# EAGLE board backend_BatProtection (EAGLE 6.3)
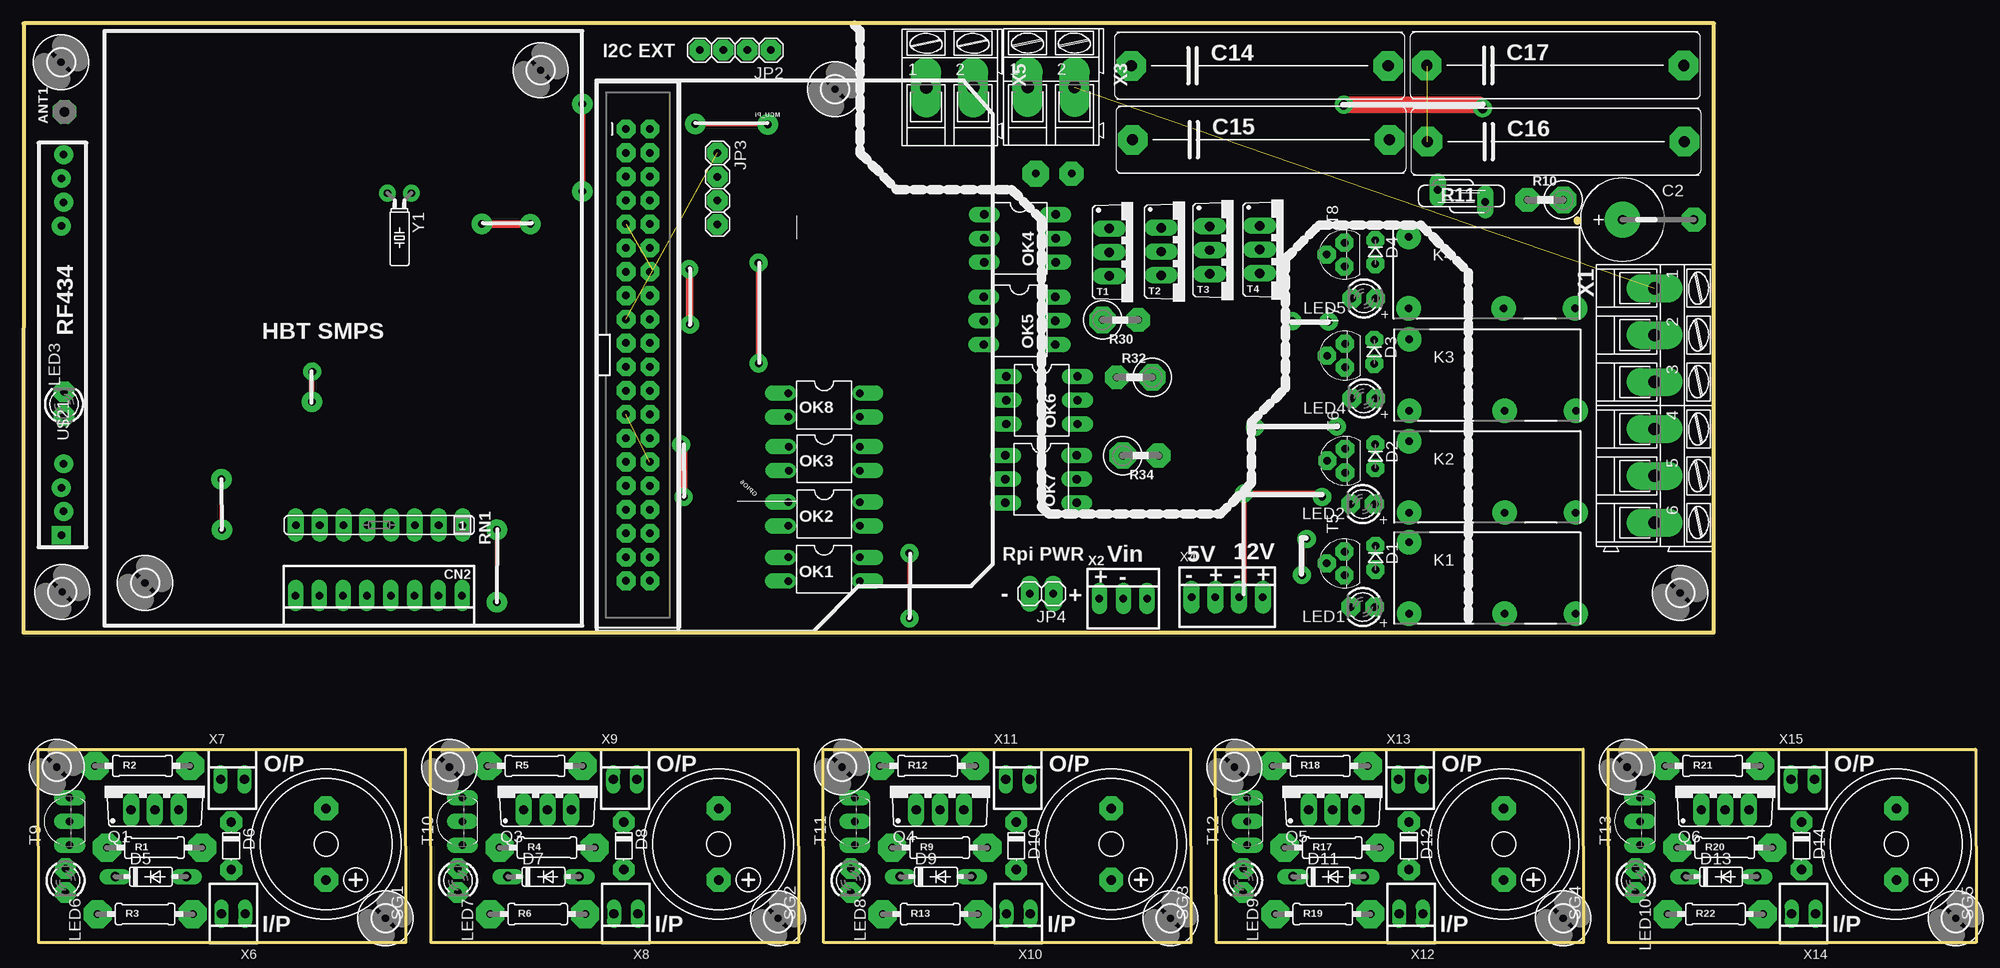
[diagram p0: board, top side]
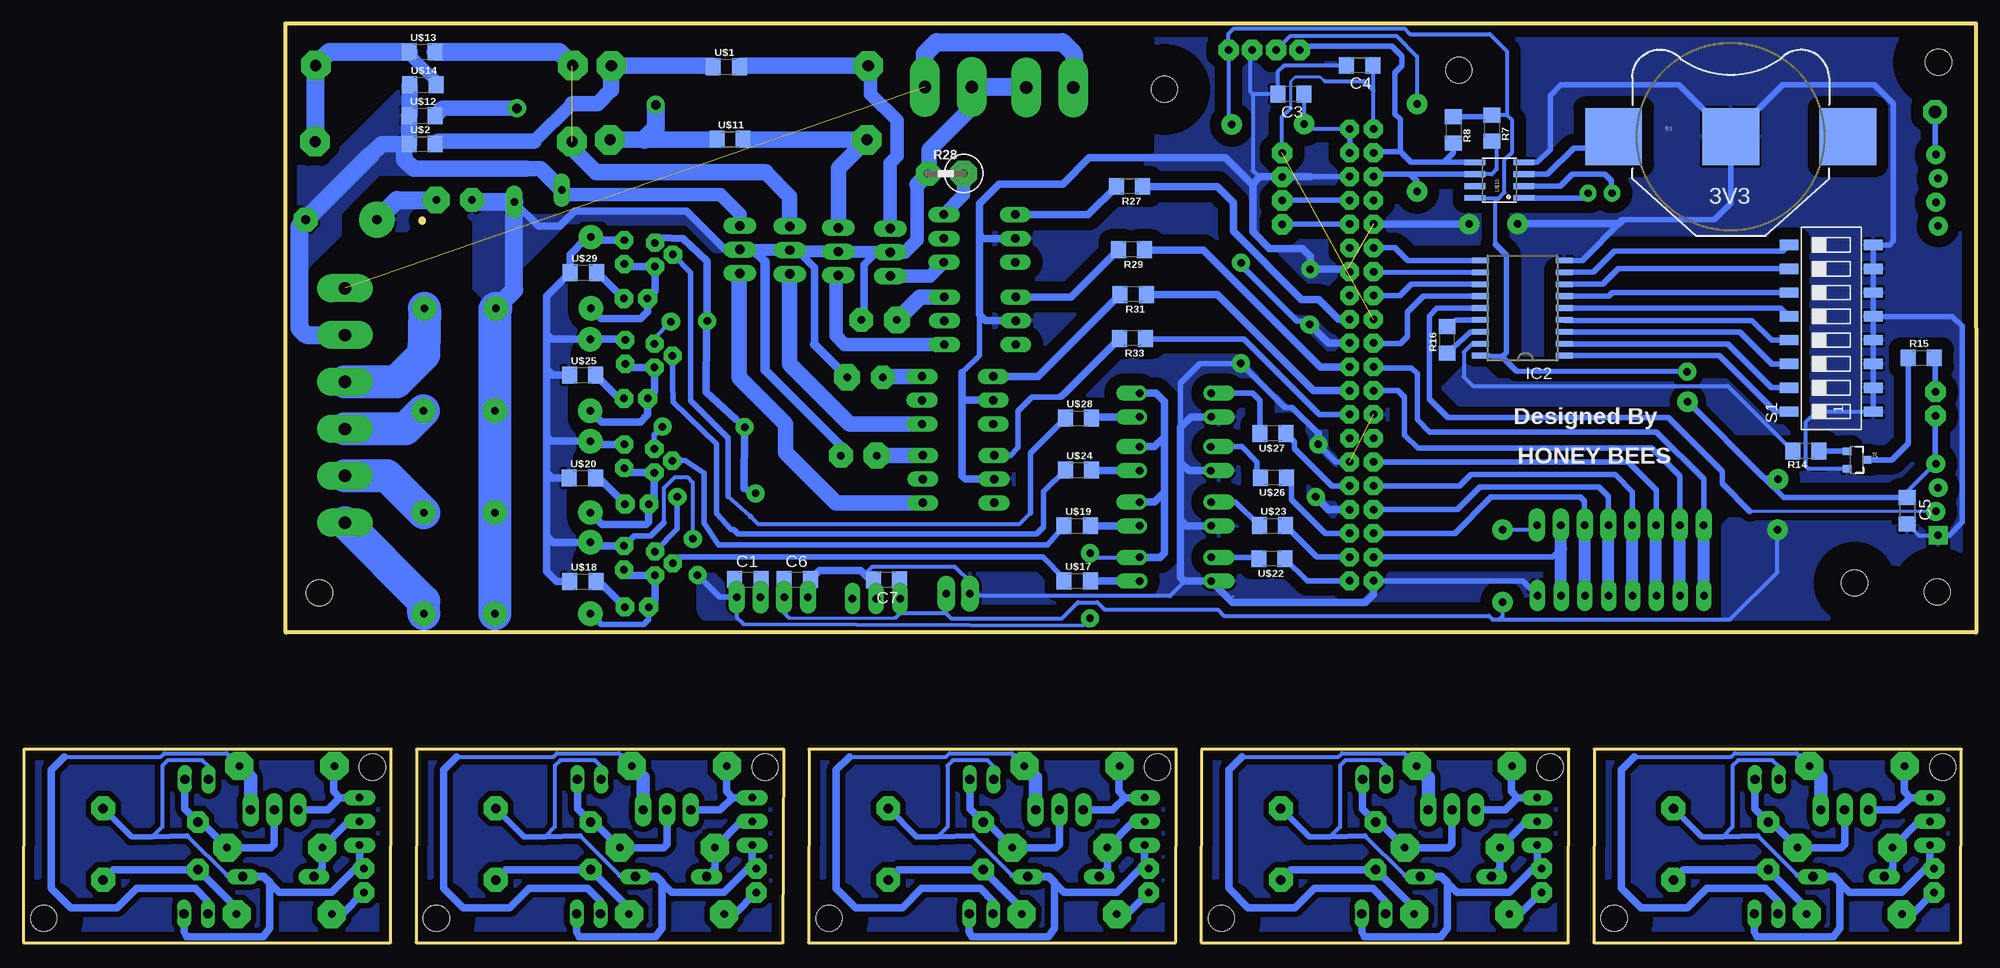
[diagram p1: board, bottom side, seen from below]

Size 208.47 x 98.16 mm. Coordinates in mm from the lower left corner, seen from the top.
Outline: 165.88,77.04 165.88,77.17
Outline: 1.56,20.65 40.77,20.65 40.83,0 1.61,0 1.56,20.64
Outline: 43.47,20.65 82.68,20.65 82.74,0 43.52,0 43.47,20.64
Outline: 85.38,20.65 124.59,20.65 124.65,0 85.43,0 85.38,20.64
Outline: 127.29,20.65 166.5,20.65 166.56,0 127.34,0 127.29,20.64
Outline: 169.2,20.65 208.41,20.65 208.47,0 169.25,0 169.2,20.64
Outline: 0,33.12 180.46,33.12 180.47,98.16 0.02,98.16 0,33.12
Copper layers (1*16): Top 0.035mm / dielectric 1.5mm / Bottom 0.035mm
Design rules "default": minimum track width 10mil, minimum drill 24mil, track to track 8mil, track to pad 8mil, pad to pad 8mil, via to via 8mil, smd to smd 8mil, copper to edge 40mil, drill to drill 8mil, minimum pad ring 10mil, minimum via ring 8mil, stop-mask expansion 4mil, vias tented up to drill 0mil, thermal gap 10mil

## Footprints (pad centres in the part's own frame; a part is rotated, then mirrored left to right if it is on the bottom)
PAD-01 = drill 1.321 pad 2.54 octagon: 1 0,0
BATTCON_20MM = smd 6.07 x 6.07: 1 -12.5,0; 2 0,0; 3 12.5,0
C1206 = smd 1.6 x 1.8: 1 -1.4,0; 2 1.4,0
E5R = drill 1 pad 3.81: + -2.54,0 | drill 1 pad 2.54 octagon: - 5.08,0
C27.5B9 = drill 1.194 pad 3.15 octagon: 1 -13.716,0; 2 13.716,0
22-23-2081 = drill 0.8 pad 1.676 long: 1 -8.89,0; 2 -6.35,0; 3 -3.81,0; 4 -1.27,0; 5 1.27,0; 6 3.81,0; 7 6.35,0; 8 8.89,0
D-2.5 = drill 0.8 pad 1.93 octagon: A 1.27,0; C -1.27,0
DO35-7 = drill 1 pad 1.676 long: A 3.81,0; C -3.81,0
D-5 = drill 1 pad 2.3 octagon: A 2.54,0; C -2.54,0
SOP18 = smd 0.6 x 1.8: 1 -5.08,-4.475; 2 -3.81,-4.475; 3 -2.54,-4.475; 4 -1.27,-4.475; 5 0,-4.475; 6 1.27,-4.475; 7 2.54,-4.475; 8 3.81,-4.475; 9 5.08,-4.475; 10 5.08,4.475; 11 3.81,4.5; 12 2.54,4.5; 13 1.27,4.5; 14 0,4.5; 15 -1.27,4.5; 16 -2.54,4.5; 17 -3.81,4.5; 18 -5.08,4.5
2X20-SHROUDED = drill 0.8 pad 2 octagon: 1 -1.27,24.13; 2 1.27,24.13; 3 -1.27,21.59; 4 1.27,21.59; 5 -1.27,19.05; 6 1.27,19.05; 7 -1.27,16.51; 8 1.27,16.51; 9 -1.27,13.97; 10 1.27,13.97; 11 -1.27,11.43; 12 1.27,11.43; 13 -1.27,8.89; 14 1.27,8.89; 15 -1.27,6.35; 16 1.27,6.35; 17 -1.27,3.81; 18 1.27,3.81; 19 -1.27,1.27; 20 1.27,1.27; 21 -1.27,-1.27; 22 1.27,-1.27; 23 -1.27,-3.81; 24 1.27,-3.81; 25 -1.27,-6.35; 26 1.27,-6.35; 27 -1.27,-8.89; 28 1.27,-8.89; 29 -1.27,-11.43; 30 1.27,-11.43; 31 -1.27,-13.97; 32 1.27,-13.97; 33 -1.27,-16.51; 34 1.27,-16.51; 35 -1.27,-19.05; 36 1.27,-19.05; 37 -1.27,-21.59; 38 1.27,-21.59; 39 -1.27,-24.13; 40 1.27,-24.13
1X04 = drill 0.8 pad 2.184 octagon: 1 -3.81,0; 2 -1.27,0; 3 1.27,0; 4 3.81,0
1X02 = drill 0.8 pad 1.93 long: 1 -1.27,0; 2 1.27,0
RE-SCHRACK = drill 0.8 pad 2.6: 11 8.89,-3.81; 14 1.27,-3.81; A1 -8.89,-3.81; A2 -8.89,3.81
LED3MM = drill 0.8 pad 2 octagon: A -1.27,0; K 1.27,0
LED3MM' = drill 0.8 pad 2.184 octagon: A -1.27,0; K 1.27,0
DIL04 = drill 0.8 pad 1.676 offset: 1 -1.27,-3.81; 2 1.27,-3.81; 3 1.27,3.81; 4 -1.27,3.81
DIL06 = drill 0.9 pad 1.676 long: 1 -2.54,-3.81; 2 0,-3.81; 3 2.54,-3.81; 4 2.54,3.81; 5 0,3.81; 6 -2.54,3.81
TO220BV = drill 1 pad 1.778 long: D 0,-2.54; G -2.54,-2.54; S 2.54,-2.54
SOT23-3 = smd 0.8 x 0.9: 1 -0.95,-1; 2 0.95,-1; 3 0,1.1
0207/10 = drill 0.8 pad 3 octagon: 1 -5.08,0; 2 5.08,0
1206 = smd 1.6 x 1.8: 1 -1.4,0; 2 1.4,0
0411V = drill 0.8 pad 2.8 octagon: 1 -2.54,0 | drill 0.8 pad 2.54 octagon: 2 1.27,0
S07K11 = drill 0.8 pad 1.778 long: 1 -0.635,-2.54; 2 0.635,2.54
SIL8 = drill 0.813 pad 1.778 long: 1 -8.89,0; 2 -6.35,0; 3 -3.81,0; 4 -1.27,0; 5 1.27,0; 6 3.81,0; 7 6.35,0; 8 8.89,0
SMS-008 = smd 1.092 x 2.007: 1 -8.89,-4.496; 2 -6.35,-4.496; 3 -3.81,-4.496; 4 -1.27,-4.496; 5 1.27,-4.496; 6 3.81,-4.496; 7 6.35,-4.496; 8 8.89,-4.496; 9 8.89,4.496; 10 6.35,4.496; 11 3.81,4.496; 12 1.27,4.496; 13 -1.27,4.496; 14 -3.81,4.496; 15 -6.35,4.496; 16 -8.89,4.496
F/HMB = drill 1.016 pad 2.54 octagon: + 3.81,0; - -3.81,0
TO220BV' = drill 1 pad 1.75 long: G 2.54,-2.54; T1 -2.54,-2.54; T2 0,-2.54
TO92 = drill 0.8 pad 1.93 octagon: 1 1.27,0; 2 0,1.905; 3 -1.27,0
TO92-EBC = drill 0.8 pad 1.676 long: B 0,-1.27; C 2.54,-1.27; E -2.54,-1.27
2,8 = hole 2.8: 0,0
SO08 = smd 0.61 x 2.21: 1 -1.905,-2.616; 2 -0.635,-2.616; 3 0.635,-2.616; 4 1.905,-2.616; 5 1.905,2.616; 6 0.635,2.616; 7 -0.635,2.616; 8 -1.905,2.616
RF-LINK_RX = drill 0.8 pad 2: +5V@1 7.62,-0.127; +5V@2 33.02,0.127; ANT 40.64,-0.127; DATA@1 2.54,-0.127; DATA@2 5.08,0.127; GND@2 35.56,-0.127; GND@3 38.1,0.127 | drill 0.8 pad 2 square: GND@1 0,0.127
AK300/6 = drill 1.321 pad 3 long: 1 -12.522,0; 2 -7.518,0; 3 -2.515,0; 4 2.515,0; 5 7.518,0; 6 12.522,0
22-23-2031 = drill 0.8 pad 1.676 long: 1 -2.54,0; 2 0,0; 3 2.54,0
AK300/2 = drill 1.321 pad 3.2 long: 1 -2.515,0; 2 2.489,0
22-23-2041 = drill 0.8 pad 1.778 long: 1 -3.81,0; 2 -1.27,0; 3 1.27,0; 4 3.81,0
22-23-2021 = drill 1 long: 1 -1.27,0; 2 1.27,0
TC26H = drill 0.8 pad 1.778: 1 -1.27,0; 2 1.27,0

## Placement (x,y rotation side)
ANT1  [PAD-01]  4.38,88.71 0 top
B1  [BATTCON_20MM]  26.2,86.06 0 bottom
C1  [C1206]  131.14,38.79 0 bottom
C2  [E5R]  173.25,77.19 0 top
C3  [C1206]  73.14,90.59 180 bottom
C4  [C1206]  65.8,93.66 180 bottom
C5  [C1206]  7.35,46.12 270 bottom
C6  [C1206]  125.85,38.79 0 bottom
C7  [C1206]  116.33,38.72 180 bottom
C14  2.2uF/250VAC  [C27.5B9]  131.99,93.63 0 top
C15  3.3uF/250VAC  [C27.5B9]  132.12,85.73 0 top
C16  2.2uF/250VAC  [C27.5B9]  163.61,85.54 0 top
C17  3.3uF/250VAC  [C27.5B9]  163.54,93.67 0 top
CN2  Capsense I/P  [22-23-2081]  37.94,37.06 180 top
D1  [D-2.5]  144.35,41.09 270 top
D2  [D-2.5]  144.33,51.93 270 top
D3  [D-2.5]  144.22,63.08 270 top
D4  [D-2.5]  144.33,73.74 270 top
D5  1N4148DO35-7  [DO35-7]  13.61,7.04 0 top
D6  [D-5]  22.18,10.32 270 top
D7  1N4148DO35-7  [DO35-7]  55.52,7.04 0 top
D8  [D-5]  64.09,10.32 270 top
D9  1N4148DO35-7  [DO35-7]  97.43,7.04 0 top
D10  [D-5]  106,10.32 270 top
D11  1N4148DO35-7  [DO35-7]  139.34,7.04 0 top
D12  [D-5]  147.91,10.32 270 top
D13  1N4148DO35-7  [DO35-7]  181.25,7.04 0 top
D14  [D-5]  189.82,10.32 270 top
IC2  HT680D  [SOP18]  48.44,67.76 90 bottom
JP1  RASPBERRYPI-B+-GPIO  [2X20-SHROUDED]  65.6,62.75 0 top
JP2  [1X04]  76,95.3 180 top
JP3  [1X04]  74.1,80.52 270 top
JP4  [1X02]  108.7,37.25 180 top
K1  RE030012  [RE-SCHRACK]  156.85,38.94 0 top
K2  RE030012  [RE-SCHRACK]  156.85,49.74 0 top
K3  RE030012  [RE-SCHRACK]  156.85,60.61 0 top
K4  RE030012  [RE-SCHRACK]  156.77,71.52 0 top
LED1  [LED3MM]  142.99,35.84 180 top
LED2  [LED3MM]  142.97,46.83 180 top
LED3  [LED3MM']  4.34,57.52 90 top
LED4  [LED3MM]  143.09,58.1 180 top
LED5  [LED3MM]  143.11,68.78 180 top
LED6  [LED3MM']  4.5,6.63 270 top
LED7  [LED3MM']  46.41,6.63 270 top
LED8  [LED3MM']  88.32,6.63 270 top
LED9  [LED3MM']  130.23,6.63 270 top
LED10  [LED3MM']  172.14,6.63 270 top
OK1  PC817  [DIL04]  85.47,39.86 270 top
OK2  PC817  [DIL04]  85.49,45.77 270 top
OK3  PC817  [DIL04]  85.5,51.68 270 top
OK4  MOC3041M  [DIL06]  106.38,75.2 270 top
OK5  MOC3041M  [DIL06]  106.33,66.4 270 top
OK6  MOC3041M  [DIL06]  108.72,57.91 270 top
OK7  MOC3041M  [DIL06]  108.65,49.49 270 top
OK8  PC817  [DIL04]  85.49,57.41 270 top
Q1  IRF540  [TO220BV]  14.04,16.71 0 top
Q2  MMBT2222A  [SOT23-3]  12.76,51.54 270 bottom
Q3  IRF540  [TO220BV]  55.95,16.71 0 top
Q4  IRF540  [TO220BV]  97.86,16.71 0 top
Q5  IRF540  [TO220BV]  139.77,16.71 0 top
Q6  IRF540  [TO220BV]  181.68,16.71 0 top
R1  [0207/10]  14,10.14 0 top
R2  [0207/10]  12.71,18.87 0 top
R3  [0207/10]  13,3.04 0 top
R4  [0207/10]  55.91,10.14 0 top
R5  [0207/10]  54.62,18.87 0 top
R6  [0207/10]  54.91,3.04 0 top
R7  4k7  [1206]  51.69,86.96 270 bottom
R8  4k7  [1206]  55.8,86.78 270 bottom
R9  [0207/10]  97.82,10.14 0 top
R10  [0411V]  161.85,79.3 180 top
R11  S07K11  [S07K11]  153.52,79.72 270 top
R12  [0207/10]  96.53,18.87 0 top
R13  [0207/10]  96.82,3.04 0 top
R14  10K  [1206]  18.17,52.49 180 bottom
R15  560R  [1206]  5.85,62.45 0 bottom
R16  33k  [1206]  56.47,64.38 90 bottom
R17  [0207/10]  139.73,10.14 0 top
R18  [0207/10]  138.44,18.87 0 top
R19  [0207/10]  138.73,3.04 0 top
R20  [0207/10]  181.64,10.14 0 top
R21  [0207/10]  180.35,18.87 0 top
R22  [0207/10]  180.64,3.04 0 top
R27  560R  [1206]  90.39,80.74 180 bottom
R28  470R/0.5W  [0411V]  110.62,82.11 180 bottom
R29  560R  [1206]  90.18,73.99 180 bottom
R30  470R/0.5W  [0411V]  117.74,66.49 0 top
R31  560R  [1206]  89.98,69.21 180 bottom
R32  470R/0.5W  [0411V]  117.99,60.37 180 top
R33  560R  [1206]  90.06,64.52 180 bottom
R34  470R/0.5W  [0411V]  119.91,52.01 0 top
RN1  [SIL8]  37.98,44.59 180 top
S1  SWS008  [SMS-008]  15.48,65.6 90 bottom
SG1  F/HMB  [F/HMB]  32.31,10.51 270 top
SG2  F/HMB  [F/HMB]  74.22,10.51 270 top
SG3  F/HMB  [F/HMB]  116.13,10.51 270 top
SG4  F/HMB  [F/HMB]  158.04,10.51 270 top
SG5  F/HMB  [F/HMB]  199.95,10.51 270 top
T1  BTB16-V  [TO220BV']  118.48,73.72 270 top
T2  BTB16-V  [TO220BV']  124,73.79 270 top
T3  BTB16-V  [TO220BV']  129.2,73.95 270 top
T4  BTB16-V  [TO220BV']  134.52,74.01 270 top
T5  BC547  [TO92]  141.05,40.49 90 top
T6  BC547  [TO92]  141.11,51.45 90 top
T7  BC547  [TO92]  141.08,62.68 90 top
T8  BC547  [TO92]  141.04,73.47 90 top
T9  [TO92-EBC]  3.67,12.94 90 top
T10  [TO92-EBC]  45.58,12.94 90 top
T11  [TO92-EBC]  87.49,12.94 90 top
T12  [TO92-EBC]  129.4,12.94 90 top
T13  [TO92-EBC]  171.31,12.94 90 top
U$1  220K  [1206]  133.42,93.53 0 bottom
U$2  2E2  [1206]  165.89,85.28 0 bottom
U$3  [2,8]  55.22,93.15 0 top
U$4  [2,8]  12.98,38.4 0 top
U$5  [2,8]  4.01,94.01 0 top
U$6  [2,8]  4.16,37.44 0 top
U$7  [2,8]  176.87,37.33 0 top
U$8  [2,8]  86.64,91.12 0 top
U$9  [2,8]  3.57,18.74 0 top
U$10  [2,8]  38.65,2.58 0 top
U$11  220K  [1206]  133.02,85.79 0 bottom
U$12  2E2  [1206]  165.91,88.3 0 bottom
U$13  220K  [1206]  165.89,95.12 0 bottom
U$14  2E2  [1206]  165.82,91.6 0 bottom
U$15  DS1307SO8  [SO08]  50.9,81.42 90 bottom
U$16  [2,8]  45.48,18.74 0 top
U$17  1k  [1206]  95.97,38.63 0 bottom
U$18  1k  [1206]  148.74,38.56 0 bottom
U$19  1k  [1206]  95.96,44.51 0 bottom
U$20  1k  [1206]  148.8,49.6 0 bottom
U$21  RF-LINK_RX  [RF-LINK_RX]  4.17,43.5 90 top
U$22  1k  [1206]  75.17,40.99 180 bottom
U$23  1k  [1206]  75.13,44.52 0 bottom
U$24  1k  [1206]  95.84,50.47 0 bottom
U$25  1k  [1206]  148.76,60.6 0 bottom
U$26  1k  [1206]  75.03,49.64 180 bottom
U$27  1k  [1206]  75.06,54.37 180 bottom
U$28  1k  [1206]  95.81,56 0 bottom
U$29  1k  [1206]  148.69,71.54 0 bottom
U$30  [2,8]  80.56,2.58 0 top
U$31  [2,8]  87.39,18.74 0 top
U$32  [2,8]  122.47,2.58 0 top
U$33  [2,8]  129.3,18.74 0 top
U$34  [2,8]  164.38,2.58 0 top
U$35  [2,8]  171.21,18.74 0 top
U$36  [2,8]  206.29,2.58 0 top
X1  [AK300/6]  174.14,57.36 270 top
X2  22-23-2031  [22-23-2031]  117.42,36.75 0 top
X3  [AK300/2]  109.72,91.36 0 top
X4  22-23-2041  [22-23-2041]  128.52,36.9 0 top
X5  [AK300/2]  98.9,91.33 0 top
X6  22-23-2021  [22-23-2021]  22.4,3.08 180 top
X7  22-23-2021  [22-23-2021]  22.33,17.43 0 top
X8  22-23-2021  [22-23-2021]  64.31,3.08 180 top
X9  22-23-2021  [22-23-2021]  64.24,17.43 0 top
X10  22-23-2021  [22-23-2021]  106.22,3.08 180 top
X11  22-23-2021  [22-23-2021]  106.15,17.43 0 top
X12  22-23-2021  [22-23-2021]  148.13,3.08 180 top
X13  22-23-2021  [22-23-2021]  148.06,17.43 0 top
X14  22-23-2021  [22-23-2021]  190.04,3.08 180 top
X15  22-23-2021  [22-23-2021]  189.97,17.43 0 top
Y1  32.768KHz  [TC26H]  40.15,80.03 180 top

## Library data of the parts
ANT1 = discrete
B1 = SparkFun-Electromechanical
C1-C7 R1-R6 R9 R10 R12 R13 R17-R22 R28 R30 R32 R34 = rcl
C14-C17 = capacitor-wima
CN2 = con-molex; MF: MOLEX; MPN: 22-23-2081; OC_FARNELL: 1756826; OC_NEWARK: 01C7592
D1-D14 = diode
IC2 = holtek; OC_FARNELL: unknown; OC_NEWARK: unknown
JP1 = SparkFun-Boards
JP2-JP4 = pinhead
K1-K4 = relay; MF: TYCO ELECTRONICS; MPN: RE030012; OC_FARNELL: 515840; OC_NEWARK: 17M1743
LED1 LED2 LED4 LED5 = adafruit
LED3 LED6-LED10 = led
OK1-OK3 OK8 = optocoupler; MPN: PC817X4J000F; OC_FARNELL: 9707727; OC_NEWARK: 97K7059
OK4 = optocoupler; MF: FAIRCHILD SEMICONDUCTOR; MPN: MOC3041M; OC_FARNELL: 1086677; OC_NEWARK: 78K6090
OK5-OK7 = optocoupler; MF: FAIRCHILD SEMICONDUCTOR; MPN: MOC3031SM; OC_FARNELL: unknown; OC_NEWARK: 34C1335
Q1 Q3-Q6 = transistor-power
Q2 = SparkFun-DiscreteSemi; PROD_ID: TRANS-08049
R7 R8 R14 = SparkFun-Passives
R11 = varistor
R15 R16 R27 R29 R31 R33 U$1 U$2 U$11-U$14 U$17-U$20 U$22-U$29 = SparkFun-Resistors
RN1 = resistor-sil; OC_FARNELL: unknown; OC_NEWARK: unknown
S1 = smd-special
SG1-SG5 = buzzer; OC_FARNELL: unknown; OC_NEWARK: unknown
T1-T4 = triac
T5-T8 = transistor
T9-T13 = transistor-neu-to92
U$3-U$10 U$16 U$30-U$36 = holes
U$15 = SparkFun-FreqCtrl
U$21 = SparkFun-RF
X1 X3 X5 = con-ptr500; OC_FARNELL: unknown; OC_NEWARK: unknown
X2 = con-molex; MF: MOLEX; MPN: 22-23-2031; OC_FARNELL: 1462950; OC_NEWARK: 30C0862
X4 = con-molex; MF: MOLEX; MPN: 22-23-2041; OC_FARNELL: 1462920; OC_NEWARK: 38C0355
X6-X15 = con-molex; MF: MOLEX; MPN: 22-23-2021; OC_FARNELL: 1462926; OC_NEWARK: 25C3832
Y1 = crystal; OC_FARNELL: unknown; OC_NEWARK: unknown

## Nets
(DIN)TE: IC2.14 U$21.DATA@1
(VT)ADOUT: IC2.17 R14.2
+: Q1.S R2.2 X6.2
+1: Q3.S R5.2 X8.2
+2: Q4.S R12.2 X10.2
+3: Q5.S R18.2 X12.2
+3V3: C4.1 JP1.1 JP1.17 JP3.1
+4: Q6.S R21.2 X14.2
+5V: C3.1 C5.1 C6.1 C7.1 IC2.18 JP1.2 JP1.4 JP2.1 JP4.1 LED3.A R7.1 R8.1 RN1.1 U$15.8 U$21.+5V@1 X2.1 X4.2
+12V: C1.1 D1.C D2.C D3.C D4.C K1.A2 K2.A2 K3.A2 K4.A2 OK1.4 OK2.4 OK3.4 OK8.4 U$18.1 U$20.1 U$25.1 U$29.1 X4.4
-12V: C1.2 T5.1 T6.1 T7.1 T8.1 X4.3
A0: IC2.1 S1.16
A1: IC2.2 S1.15
A2: IC2.3 S1.14
A3: IC2.4 S1.13
A4: IC2.5 S1.12
A5: IC2.6 S1.11
A6: IC2.7 S1.10
A7: IC2.8 S1.9
DOWN: CN2.7 JP1.23 RN1.7
FAN_ON/OFF: CN2.8 JP1.21 RN1.8
FAN_REG: C2.- R11.1 T4.T1 U$2.1 U$12.1 U$14.1 X1.2
G: D5.A LED6.A SG1.- T9.E X6.1 X7.1
G1: D7.A LED7.A SG2.- T10.E X8.1 X9.1
G2: D9.A LED8.A SG3.- T11.E X10.1 X11.1
G3: D11.A LED9.A SG4.- T12.E X12.1 X13.1
G4: D13.A LED10.A SG5.- T13.E X14.1 X15.1
GND: B1.2 C3.2 C4.2 C5.2 C6.2 C7.2 CN2.1 IC2.9 JP1.6 JP1.9 JP1.14 JP1.20 JP1.25 JP1.30 JP1.34 JP1.39 JP2.2 JP3.2 JP4.2 OK1.2 OK2.2 OK3.2 OK4.2 OK5.2 OK6.2 OK7.2 OK8.2 Q2.2 S1.1 S1.2 S1.3 S1.4 S1.5 S1.6 S1.7 S1.8 U$15.4 U$21.GND@1 X2.2 X4.1
L1: JP1.40 U$22.1
L2: JP1.38 U$23.2
L3: JP1.36 U$26.1
L4: JP1.32 U$27.1
LEVEL1: JP1.18 R27.1
LEVEL2: JP1.22 R29.1
LEVEL3: JP1.24 R31.1
LEVEL4: JP1.26 R33.1
LINE: K1.14 K2.14 K3.14 K4.14 R10.2 R11.2 R28.2 R30.2 R32.1 R34.2 T1.T2 T2.T2 T3.T2 T4.T2 X3.1 X5.2
N$1: OK6.1 R31.2
N$2: OK4.1 R27.2
N$3: OK5.1 R29.2
N$4: OK4.6 R28.1
N$5: OK7.1 R33.2
N$6: JP1.16
N$7: OK1.3 U$17.2
N$8: JP1.12
N$9: T5.2 U$17.1
N$10: D1.A K1.A1 LED1.K T5.3
N$11: LED1.A U$18.2
N$12: OK1.1 U$22.2
N$13: U$15.2 Y1.2
N$14: OK2.1 U$23.1
N$15: OK2.3 U$19.2
N$16: T6.2 U$19.1
N$17: C2.+ R10.1
N$18: D2.A K2.A1 LED2.K T6.3
N$19: Q2.1 R14.1
N$20: U$15.7
N$21: U$15.1 Y1.1
N$22: K3.11 X1.4
N$23: B1.1 U$15.3
N$24: Q2.3 R15.1
N$25: LED2.A U$20.2
N$26: K1.11 X1.6
N$27: LED3.K R15.2
N$28: K2.11 X1.5
N$29: OK5.6 R30.1
N$30: OK6.6 R32.2
N$31: ANT1.1 U$21.ANT
N$32: OK3.1 U$26.2
N$33: OK8.3 U$28.2
N$34: OK7.6 R34.1
N$35: OK3.3 U$24.2
N$36: T7.2 U$24.1
N$37: T8.2 U$28.1
N$38: D3.A K3.A1 LED4.K T7.3
N$39: K4.11 X1.3
N$40: LED4.A U$25.2
N$41: D4.A K4.A1 LED5.K T8.3
N$43: LED5.A U$29.2
N$44: OK8.1 U$27.2
N$45: Q1.G R2.1 T9.C
N$46: D6.C Q1.D R1.2 X7.2
N$47: D5.C R1.1 T9.B
N$48: Q3.G R5.1 T10.C
N$49: D6.A R3.2 SG1.+
N$50: LED6.K R3.1
N$51: D8.C Q3.D R4.2 X9.2
N$52: D7.C R4.1 T10.B
N$53: D8.A R6.2 SG2.+
N$54: OK4.4 T1.G
N$55: C14.1 T1.T1 U$1.2
N$56: C14.2 U$1.1 U$2.2
N$57: LED7.K R6.1
N$59: Q4.G R12.1 T11.C
N$60: D10.C Q4.D R9.2 X11.2
N$61: D9.C R9.1 T11.B
N$62: OK5.4 T2.G
N$63: C15.1 T2.T1 U$11.2
N$64: C15.2 U$11.1 U$12.2
N$65: D10.A R13.2 SG3.+
N$66: LED8.K R13.1
N$68: Q5.G R18.1 T12.C
N$69: D12.C Q5.D R17.2 X13.2
N$70: OK6.4 T3.G
N$71: C16.1 C17.1 T3.T1 U$13.2
N$72: C16.2 C17.2 U$13.1 U$14.2
N$73: D11.C R17.1 T12.B
N$74: D12.A R19.2 SG4.+
N$75: LED9.K R19.1
N$77: Q6.G R21.1 T13.C
N$78: OK7.4 T4.G
N$79: D14.C Q6.D R20.2 X15.2
N$80: D13.C R20.1 T13.B
N$81: D14.A R22.2 SG5.+
N$82: LED10.K R22.1
NEUTRAL: X1.1 X3.2 X5.1
OSC1: IC2.16 R16.1
OSC2: IC2.15 R16.2
RFD0: IC2.10 JP1.11
RFD1: IC2.11 JP1.13
RFD2: IC2.12 JP1.15
RFD3: IC2.13 JP1.19
RX: JP1.10 JP3.4
SCL: JP1.5 JP2.3 R7.2 U$15.6
SDA: JP1.3 JP2.4 R8.2 U$15.5
SW-1: CN2.2 JP1.37 RN1.2
SW-2: CN2.3 JP1.35 RN1.3
SW-3: CN2.4 JP1.33 RN1.4
SW-4: CN2.5 JP1.31 RN1.5
TX: JP1.8 JP3.3
UP: CN2.6 JP1.29 RN1.6

## Tracks (layer width: path | path; a pad name or v marks a point on that pad's centre or on a via)
(DIN)TE
  Bottom 0.305: U$21.DATA@1 24.13,46.04
  Bottom 0.61: 24.13,46.04 27.09,49 27.09,50.3 32.83,56.05 56.37,56.05 58.39,58.07 58.39,66.91 57.56,67.74 52.95,67.74 IC2.14
(VT)ADOUT
  Bottom 0.406: IC2.17 52.73,63.95 52.63,63.85 53.89,63.85 54.69,63.04 54.69,60.41 53.71,59.43 26.51,59.43 R14.2
  pour Bottom (isolate 0.813): 19.94,54.39 25.59,60.04 51.12,60.04 52.58,61.49 54.67,61.49 56.94,59.22 56.94,59.16 54.85,57.07 32.22,57.07 29.55,54.4 19.95,54.4
+
  Bottom 0.406: 36.46,19.84 26.14,19.84 25.76,20.22 19.15,20.22 18.77,19.84
  Bottom 0.813: X6.2 21.13,4.42 22.49,5.78 28.75,5.78 30.81,3.72 35.8,3.72 37.86,5.78 37.86,18.44 36.46,19.84 | 18.77,19.84 R2.2
  Bottom 1.422: Q1.S 16.58,17.65 R2.2
+1
  Bottom 0.406: 78.37,19.84 68.05,19.84 67.67,20.22 61.06,20.22 60.68,19.84
  Bottom 0.813: X8.2 63.04,4.42 64.4,5.78 70.66,5.78 72.72,3.72 77.71,3.72 79.77,5.78 79.77,18.44 78.37,19.84 | 60.68,19.84 R5.2
  Bottom 1.422: Q3.S 58.49,17.65 R5.2
+2
  Bottom 0.406: 120.28,19.84 109.96,19.84 109.58,20.22 102.97,20.22 102.59,19.84
  Bottom 0.813: X10.2 104.95,4.42 106.31,5.78 112.57,5.78 114.63,3.72 119.62,3.72 121.68,5.78 121.68,18.44 120.28,19.84 | 102.59,19.84 R12.2
  Bottom 1.422: Q4.S 100.4,17.65 R12.2
+3
  Bottom 0.406: 162.19,19.84 151.87,19.84 151.49,20.22 144.88,20.22 144.5,19.84
  Bottom 0.813: X12.2 146.86,4.42 148.22,5.78 154.48,5.78 156.54,3.72 161.53,3.72 163.59,5.78 163.59,18.44 162.19,19.84 | 144.5,19.84 R18.2
  Bottom 1.422: Q5.S 142.31,17.65 R18.2
+3V3  (1 unrouted)
  Bottom 0.305: 73.17,89.09 73.17,91.96 72.68,92.46 70.04,92.46 69.56,91.98
  Bottom 0.406: JP1.1 64.33,90.95 | 64.33,90.95 64.33,93.39 C4.1 | JP3.1 74.1,88.17 73.17,89.09 | 69.56,91.98 65.36,91.98 64.33,90.95
+4
  Bottom 0.406: 204.1,19.84 193.78,19.84 193.4,20.22 186.79,20.22 186.41,19.84
  Bottom 0.813: X14.2 188.77,4.42 190.13,5.78 196.39,5.78 198.45,3.72 203.44,3.72 205.5,5.78 205.5,18.44 204.1,19.84 | 186.41,19.84 R21.2
  Bottom 1.422: Q6.S 184.22,17.65 R21.2
+5V  (via drill 0.8 pad 1.93, 0.8 pad 2.18)
  Top 0.406: v50.56,36.35 v50.56,44.11 | v21.2,44.07 21.16,44.12 v21.16,49.47 | v79.46,87.35 71.81,87.35 v71.74,87.43
  Top 0.61: v30.78,57.75 30.78,61.16 v30.84,60.96
  Bottom 0.305: 126.75,34.68 115.39,34.68
  Bottom 0.406: U$15.8 50.96,79.51 | 50.96,79.51 50.34,80.13 50.34,83.6 49.52,84.42 49.52,87.8 50.09,88.37 | 50.09,88.37 R7.1 | 4.34,51.16 7.35,48.15 C5.1 | C6.1 127.25,35.18 126.75,34.68 | 115.39,34.68 114.79,35.27 | 114.79,35.27 114.79,36.66 X2.1 | JP4.1 109.97,35.17 | 109.97,35.17 109.43,34.63 97.58,34.63 95.88,36.33 93.82,36.33 93.05,35.56 80.94,35.56 80.28,34.9 52.01,34.9 51.59,34.48 50.93,34.48 | v50.56,44.11 47.35,44.11 RN1.1 | 109.97,35.17 114.69,35.17 114.79,35.27 | 50.93,34.48 26.27,34.48 21.2,39.55 v21.2,44.07 | v21.16,49.47 21.36,49.67 22.7,49.67 | v50.56,36.35 50.56,34.85 50.93,34.48 | 50.09,88.37 50.12,88.39 50.12,95.2 51.93,97.01 60.44,97.01 61.05,97.62 79.22,97.62 79.81,97.03 JP2.1 79.81,87.71 v79.46,87.35 | C3.1 v71.74,87.43 71.25,86.94 66.92,86.94 JP1.2 | 51.31,74.6 51.31,79.17 50.96,79.51
  Bottom 0.61: LED3.A 4.34,51.16 U$21.+5V@1 | IC2.18 50.64,62.56 | 50.64,62.56 50.13,63.01 50.13,73.43 51.31,74.6 | JP1.2 JP1.4 | C5.1 20.55,47.52 22.7,49.67 v30.78,57.75 | v30.84,60.96 49.09,61.05 50.64,62.56 | R8.1 51.88,88.18 R7.1
  Bottom 0.813: C7.1 114.93,36.8 X2.1 114.88,36.81 | X4.2 C6.1
  pour Bottom (isolate 0.813): 9.4,45.15 26.29,45.15 26.94,44.49 26.94,33.77 8.83,33.77 8.83,45.17 9.32,45.17
+12V  (via drill 0.8 pad 1.93)
  Top 0.406: v94.6,34.62 94.59,35.93 v94.59,41.58
  Top 0.61: v137,43.1 136.5,42.61 v136.5,39.25
  Bottom 0.406: 140.08,44.85 140.08,48.54 138.91,49.71 137.56,49.71 137,49.15 v137,43.1 | X4.4 132.33,34.73 131.61,34.01 95.34,33.88 v94.6,34.62 | v94.59,41.58 94.14,41.13 OK1.4
  Bottom 0.61: D1.C 143.29,43.42 141.51,43.42 140.08,44.85 | v136.5,39.25 134.15,36.9 X4.4
  Bottom 0.813: OK8.4 87.56,58.68 86.65,57.77 86.65,54.01 | 86.65,54.01 86.65,48.11 | 86.65,48.11 86.65,41.58 87.12,41.11 89.27,41.11 OK1.4 | OK2.4 87.72,47.04 86.65,48.11 | OK3.4 87.71,52.95 86.65,54.01 | D4.C 147.55,75.01 K4.A2 148.01,75.2 148.37,75.2 150.09,73.49 U$29.1 152.6,69.03 152.6,64.97 | 152.6,64.97 152.6,61.24 | 152.6,61.24 152.6,54.03 | 152.6,54.03 152.6,50.19 | 152.6,50.19 152.6,43.43 | 152.6,43.43 152.6,39.62 151.55,38.56 U$18.1 | 152.6,43.43 151.93,42.75 K1.A2 147.56,42.36 D1.C | U$20.1 152.01,49.6 152.6,50.19 | 152.6,54.03 152.12,53.55 K2.A2 147.61,53.2 D2.C | U$25.1 151.97,60.6 152.6,61.24 | 152.6,64.97 152.05,64.42 K3.A2 144.29,64.42 D3.C | X4.4 132.54,37.1 C1.1
  pour Bottom: 150.58,70.92 150.58,67.5 arc-90 148.1,65.02 arc-90 150.3,62.81 150.3,60.76 arc90 150.58,60.48 152.48,60.48 arc90 152.63,60.64 152.63,69.03 152.48,69.03 150.58,70.92
  pour Bottom: 150.61,60.21 150.61,56.21 arc-90 147.96,53.56 arc-90 150.07,51.45 150.07,49.55 arc90 150.52,49.11 152.52,49.11 152.52,60.21 150.61,60.21
  pour Bottom: 150.7,49.48 150.7,45.56 arc-90 148.01,42.87 arc-90 150.09,40.8 150.09,38.2 arc90 152.62,40.74 152.62,49.52 152.6,49.5 150.72,49.5
  pour Bottom: 131.72,34.07 134.49,34.07 arc90 136.41,35.99 136.41,39.22 arc-90 136.52,39.33 134.71,39.33 132.33,36.96 132.33,34.71 131.72,34.09
-12V  (via drill 0.8 pad 1.93)
  Top 0.406: v135.47,66.37 135.45,66.33 v139.35,66.29
  Top 0.61: v140.24,55.09 v131.48,55.04 | v138.65,47.58 138.26,47.98 v130.3,47.98 130.3,37.41 X4.3
  Bottom 0.406: v139.35,66.29 141.08,64.56 T7.1
  Bottom 0.61: T6.1 141.11,54.22 v140.24,55.09 | v131.48,55.04 132.38,55.83 | 135.54,65.37 v135.47,66.37 | T5.1 138.65,44.16 v138.65,47.58
  Bottom 0.813: X4.3 129.74,36.95 C1.2 | T8.1 140.52,75.25 138.03,75.18 135.47,72.79 v135.47,66.37 | 132.38,55.83 135.6,58.79 135.54,65.37 | v130.3,47.98 131.5,48.49 v131.48,55.04
A0
  Bottom 0.61: S1.16 21.44,56.71 27.4,62.67 43.95,62.67 IC2.1
A1
  Bottom 0.61: S1.15 21.85,59.25 26.53,63.94 43.95,63.94 IC2.2
A2
  Bottom 0.61: S1.14 21.82,61.79 25.23,65.2 43.95,65.2 IC2.3
A3
  Bottom 0.61: S1.13 21.81,64.33 23.92,66.44 43.91,66.44 IC2.4
A4
  Bottom 0.61: S1.12 20.86,67.76 IC2.5
A5
  Bottom 0.61: S1.11 38.81,69.41 39.22,69.01 43.94,69.01 IC2.6
A6
  Bottom 0.61: S1.10 38.2,71.95 39.83,70.32 43.94,70.32 IC2.7
A7
  Bottom 0.61: IC2.8 43.91,71.62 40.85,71.62 38.63,73.84 20.63,73.84 S1.9
DOWN
  Bottom 0.61: RN1.7 31.63,49.83 34.61,52.81 59.61,52.81 61.02,54.22 61.02,58.24 61.72,58.94 JP1.23
  Bottom 1.27: CN2.7 arc90 31.63,37.1 RN1.7
FAN_ON/OFF
  Bottom 0.61: RN1.8 29.09,49.48 34.14,54.53 58.34,54.53 59.66,55.85 59.66,60.75 60.28,61.36 64.21,61.36 JP1.21
  Bottom 1.27: CN2.8 arc90 29.09,37.1 RN1.8
FAN_REG
  Bottom 1.422: T4.T1 131.97,77.78 134.05,79.86 150.49,79.86 151.35,80.72
  Bottom 1.676: 154.74,82.63 153.26,82.63 151.35,80.72 R11.1
  Bottom 1.778: 171.39,84.13 170.24,85.28 167.8,85.28 | 167.8,85.28 U$2.1 U$12.1 167.22,88.38 U$14.1 | 154.74,82.63 166.8,82.63 167.8,83.63 167.8,85.28
  Bottom 1.93: X1.2 178.27,64.88 179.02,65.63 179.02,76.5 C2.- 171.39,84.13
  pour Bottom (isolate 1.016, rank 2): 167.1,82.06 170.52,82.06 173.32,79.26 174.72,77.86 174.72,75.56 178.59,71.69 179.63,71.69 180.07,72.13 180.07,82.39 179.6,82.86 176.52,82.86 167.88,91.5 167.09,91.5 167.08,91.5 167.08,82.06
G
  Bottom 0.406: 19.1,7.17 23.32,11.39 | X7.1 21.06,18.81 21.73,19.48 25.41,19.48 26,18.89 26,12.34 27.05,11.29
  Bottom 0.61: 17.39,7.07 19.1,7.17 | 23.32,11.39 27.05,11.29 29.28,11.29 SG1.-
  Bottom 0.813: T9.E 4.94,8.35 | 4.94,8.35 LED6.A | X6.1 23.67,1.14 23.38,0.64 15.23,0.64 14.56,1.53 14.56,6.47 15.16,7.07 17.39,7.07 D5.A 15.21,7.04 13.54,5.37 7.92,5.37 4.94,8.35
G1
  Bottom 0.406: 61.01,7.17 65.23,11.39 | X9.1 62.97,18.81 63.64,19.48 67.32,19.48 67.91,18.89 67.91,12.34 68.96,11.29
  Bottom 0.61: 59.3,7.07 61.01,7.17 | 65.23,11.39 68.96,11.29 71.19,11.29 SG2.-
  Bottom 0.813: T10.E 46.85,8.35 | 46.85,8.35 LED7.A | X8.1 65.58,1.14 65.29,0.64 57.14,0.64 56.47,1.53 56.47,6.47 57.07,7.07 59.3,7.07 D7.A 57.12,7.04 55.45,5.37 49.83,5.37 46.85,8.35
G2
  Bottom 0.406: 102.92,7.17 107.14,11.39 | X11.1 104.88,18.81 105.55,19.48 109.23,19.48 109.82,18.89 109.82,12.34 110.87,11.29
  Bottom 0.61: 101.21,7.07 102.92,7.17 | 107.14,11.39 110.87,11.29 113.1,11.29 SG3.-
  Bottom 0.813: T11.E 88.76,8.35 | 88.76,8.35 LED8.A | X10.1 107.49,1.14 107.2,0.64 99.05,0.64 98.38,1.53 98.38,6.47 98.98,7.07 101.21,7.07 D9.A 99.03,7.04 97.36,5.37 91.74,5.37 88.76,8.35
G3
  Bottom 0.406: 144.83,7.17 149.05,11.39 | X13.1 146.79,18.81 147.46,19.48 151.14,19.48 151.73,18.89 151.73,12.34 152.78,11.29
  Bottom 0.61: 143.12,7.07 144.83,7.17 | 149.05,11.39 152.78,11.29 155.01,11.29 SG4.-
  Bottom 0.813: T12.E 130.67,8.35 | 130.67,8.35 LED9.A | X12.1 149.4,1.14 149.11,0.64 140.96,0.64 140.29,1.53 140.29,6.47 140.89,7.07 143.12,7.07 D11.A 140.94,7.04 139.27,5.37 133.65,5.37 130.67,8.35
G4
  Bottom 0.406: 186.74,7.17 190.96,11.39 | X15.1 188.7,18.81 189.37,19.48 193.05,19.48 193.64,18.89 193.64,12.34 194.69,11.29
  Bottom 0.61: 185.03,7.07 186.74,7.17 | 190.96,11.39 194.69,11.29 196.92,11.29 SG5.-
  Bottom 0.813: T13.E 172.58,8.35 | 172.58,8.35 LED10.A | X14.1 191.31,1.14 191.02,0.64 182.87,0.64 182.2,1.53 182.2,6.47 182.8,7.07 185.03,7.07 D13.A 182.85,7.04 181.18,5.37 175.56,5.37 172.58,8.35
GND  (via drill 0.8 pad 1.93, 0.8 pad 2.18)  (2 unrouted)
  Top 0.61: v78.49,61.85 78.49,72.56 v78.47,72.59
  Top 0.813: v70.5,47.59 70.5,52.93 v70.23,53.2 | v71.15,66.01 71.15,71.83 v71.08,71.9 | v54.13,76.72 48.99,76.72 v48.96,76.76
  Bottom 0.406: Q2.2 17.91,50.59 18.16,50.84 18.16,55.6 17.03,56.73 11,56.73 S1.1 | C5.2 6.12,43.5 U$21.GND@1 | 118.67,39.33 117.86,40.13 109.01,40.13 107.43,38.55 JP4.2 107.07,37.25 106.83,37.01 86.06,37.01 84.45,38.63 | 77.21,90.59 C3.2 74.56,90.61 74.56,92.99 73.89,93.66 C4.2 | 77.21,90.59 77.46,90.84 77.46,95.12 JP2.2 | 77.21,90.59 77.21,82.42 76.51,81.72
  Bottom 0.61: S1.5 S1.6 S1.7 S1.8 9.23,74.49 8.82,74.9 8.82,89.58 10.86,91.62 20.64,91.62 B1.2 | S1.5 S1.4 S1.3 S1.2 S1.1 | U$21.GND@1 2.88,43.5 1.48,44.89 1.48,65.82 2.53,66.87 S1.5 | S1.5 | IC2.9 42.06,72.84 37.82,77.08 37.67,77.22 27.92,77.22 26.2,78.95 B1.2 | U$15.4 46.85,83.32 45.48,84.69 45.48,90.45 44.32,91.61 31.75,91.61 B1.2 | JP1.39 48.39,38.62 CN2.1 | JP1.6 71.05,81.8 | 74.08,81.8 JP3.2 | JP1.30 68.35,51.32 v70.23,53.2 | 84.93,54.5 84.93,59.77 82.84,61.85 v78.49,61.85 73.76,57.13 73.02,57.13 70.23,54.33 | v78.47,72.59 78.47,72.35 72.51,66.39 71.53,66.39 v71.15,66.01 | 106.42,67.07 106.42,62.71 108.25,60.87
  Bottom 0.813: OK8.2 83.83,56.14 84.93,55.04 84.93,54.5 84.93,51.28 | 84.93,51.28 84.93,45.14 | 84.93,45.14 84.93,39 84.55,38.63 84.45,38.63 81.7,38.63 OK1.2 79.38,36.31 65.19,36.31 64.33,37.17 JP1.39 | OK2.2 84.29,44.5 84.93,45.14 | OK3.2 84.05,50.41 84.93,51.28 | X2.2 117.73,37.06 C7.2 118.05,38.72 118.67,39.33 119.08,39.74 123.5,39.74 C6.2 124.45,37.15 X4.1 | JP1.34 69.15,46.24 v70.5,47.59 | v70.23,53.2 70.23,54.33 | JP1.20 69.16,64.02 v71.15,66.01 | JP1.14 67.13,71.9 v71.08,71.9 v71.09,71.9 71.09,73.26 71.94,74.11 75.42,74.11 77.21,75.91 77.21,80.89 77.28,80.95 | 77.28,80.95 76.51,81.72 76.43,81.8 74.08,81.8 71.05,81.8 | OK4.2 106,75.2 106.42,75.62 | 106.42,75.62 106.42,78.91 104.31,81.01 97.47,81.01 94.69,83.8 80.12,83.8 77.28,80.95 | 106.42,75.62 106.42,67.07 105.74,66.4 OK5.2 | 108.25,60.87 108.25,58.16 | 108.25,58.16 108.25,49.85 107.9,49.5 OK7.2 | OK6.2 108,57.91 108.25,58.16 | JP1.9 v54.13,76.72 | v48.96,76.76 38.14,76.76 37.82,77.08
  pour Bottom (isolate 1.27): 0.36,98.32 87.55,98.32 87.55,84.31 93.67,78.2 102.42,78.2 104.83,75.79 104.83,40.81 111.82,40.81 111.82,33.81 0.33,33.81 0.33,98.28
L1
  Bottom 0.61: JP1.40 71.41,38.62 U$22.1
L2
  Bottom 0.61: JP1.38 70.36,41.16 U$23.2
L3
  Bottom 0.61: JP1.36 69.45,43.7 73.08,47.33 73.08,49.1 U$26.1
L4
  Bottom 0.61: JP1.32 68.79,48.78 72.77,52.76 72.77,53.47 U$27.1
LEVEL1
  Bottom 0.813: R27.1 88.98,80.73 80.99,80.73 79.29,79.03 79.29,75.96 72.02,68.68 70.18,68.68 68.06,66.56 JP1.18
LEVEL2
  Bottom 0.813: JP1.22 70,61.48 82.48,73.96 88.75,73.96 R29.1
LEVEL3
  Bottom 0.813: JP1.24 70.75,58.94 81.02,69.21 R31.1
LEVEL4
  Bottom 0.61: JP1.26 69.25,56.4 69.26,56.38 70.09,56.38 78.15,64.44 88.59,64.44 R33.1
LINE
  Bottom 0.813: R30.2 118.71,66.8 118.71,72.38 117.36,73.72 T1.T2 | 124.01,63.86 124.01,72.06 125.9,73.95 T3.T2 | 130.6,74.01 T4.T2 133.56,74.01 137.66,78.11 149.6,78.11 151.21,76.5 153.48,76.5 R11.2 | 160.36,79.08 R10.2
  Bottom 1.016: R32.1 124.01,63.86 | R34.2 121.18,53.02 129.3,61.14 129.3,72.71 130.6,74.01
  Bottom 1.27: T1.T2 121.39,73.72 T2.T2 126.5,73.79 T3.T2 131.92,73.95 T4.T2
  Bottom 1.422: 111.8,82.21 R28.2 | 113.06,80.94 113.06,75.02 114.36,73.72 T1.T2
  Bottom 1.676: X3.1 107.21,89.22 111.8,84.63 111.8,82.21 | R28.2 113.06,80.94
  Bottom 1.93: 160.36,79.08 R11.2 156.06,69.69 K4.14 | X5.2 107.18,91.33 X3.1
  Bottom 3.5: K1.14 K2.14 K3.14 158.12,67.63 K4.14
  pour Bottom: 149.78,77.64 155.71,71.71 155.71,71.71 156.17,72.17 156.17,77.8 155.99,77.63 149.8,77.63
  pour Bottom: 158.29,67.79 160.3,69.79 160.3,76.94 161.28,77.92 161.28,79.09 arc90 161.17,79.2 158.23,79.2 arc-90 156.83,79.13 156.83,67.74
  pour Bottom: 134.54,74.94 137.71,78.11 149.6,78.11 150.85,76.85 150.85,76.84 150.74,76.96 149.18,76.96 148.91,77.23 146.46,77.23 146.02,76.78 137.68,76.78 134.76,73.86 133.13,73.86 134.52,74.93
N$1
  Bottom 0.813: R31.2 100.14,60.45 OK6.1
N$2
  Bottom 0.813: R27.2 94.8,77.74 OK4.1
N$3
  Bottom 0.813: R29.2 96.63,68.94 OK5.1
N$4
  Bottom 1.422: R28.1 108.08,79.84 OK4.6
N$5
  Bottom 0.61: OK7.1 103.11,52.03 102.27,52.87 102.27,56.77 100.79,58.25 97.73,58.25 97.35,58.63
  Bottom 0.813: R33.2 97.35,58.63 97.63,58.34
N$7
  Bottom 0.813: OK1.3 94.53,38.59 U$17.2
N$9
  Bottom 0.61: T5.2 138.48,41.16 99.63,41.16 97.37,38.9 U$17.1
N$10
  Bottom 0.61: K1.A1 146.8,33.97 142.28,33.97 141.72,34.53 LED1.K
  Bottom 0.813: D1.A 143.76,39.22 T5.3 141.05,36.51 LED1.K
N$11
  Bottom 0.813: LED1.A 146.98,38.56 U$18.2
N$12
  Bottom 0.61: OK1.1 76.72,41.13 U$22.2
N$13
  Bottom 0.61: U$15.2 44.37,80.78 43.09,82.06 39.61,82.06 38.93,81.37 38.93,80.08 Y1.2
N$14
  Bottom 0.61: OK2.1 79.04,47.04 U$23.1
N$15
  Bottom 0.813: OK2.3 94.55,44.5 U$19.2
N$16
  Bottom 0.61: U$19.1 99.13,42.44 134.25,42.44 135.78,44.82 135.78,50.15 137.81,51.5 139.15,51.5 T6.2
N$17
  Bottom 1.93: C2.+ 168.6,79.3 R10.1
  pour Bottom: 164.39,79.29 167.65,76.03 171.21,76.03 167.97,79.28 164.42,79.28
N$18
  Bottom 0.813: D2.A 143.85,50.18 T6.3 141.11,47.42 LED2.K 141.7,44.93 141.98,44.65 146.68,44.65 K2.A1
N$19
  Bottom 0.61: Q2.1 R14.1
N$21
  Bottom 0.61: U$15.1 41.93,79.51 Y1.1
N$22
  Bottom 3.5: K3.11 167.7,54.84 X1.4
N$23
  Bottom 0.61: U$15.3 45.75,82.05 42.96,84.84 39.92,84.84 B1.1
N$24
  Bottom 0.61: R15.1 7.25,53.29 8.98,51.55 11.65,51.55 Q2.3
N$25
  Bottom 0.813: LED2.A 147.01,49.6 U$20.2
N$26
  Bottom 3.5: K1.11 165.74,36.43 X1.6
N$27
  Bottom 0.61: LED3.K 4.34,62.35 R15.2
N$28
  Bottom 3.5: K2.11 169.65,49.84 X1.5
N$29
  Bottom 1.676: OK5.6 112.75,68.94 R30.1
N$30
  Bottom 1.676: OK6.6 116.63,60.45 R32.2
N$31
  Bottom 0.61: ANT1.1 4.38,84.22 U$21.ANT
N$32
  Bottom 0.61: OK3.1 78.4,52.95 76.77,51.32 76.77,49.99 U$26.2
N$33
  Bottom 0.813: OK8.3 94.28,56.14 U$28.2
N$34
  Bottom 1.676: OK7.6 R34.1
N$35
  Bottom 0.813: OK3.3 94.39,50.41 U$24.2
N$36
  Bottom 0.61: T7.2 139.18,59.76 139.16,59.67 139.11,57.72 134.49,53.23 134.49,45.81 132.9,44.09 132.64,44.09 132.17,43.63 100.29,43.63 99.55,44.37 99.55,48.16 U$24.1
N$37
  Bottom 0.406: 130.85,45.52 133.24,47.61 | 100.94,45.89 102.17,44.65 129.98,44.65 130.85,45.52
  Bottom 0.61: U$28.1 100.94,52.27 100.94,45.89 | 130.85,45.52 | 133.24,47.61 133.24,53.88 137.23,57.87 137.23,71.56 T8.2
N$38
  Bottom 0.813: K3.A1 146.76,55.6 142.59,55.6 141.82,56.37 LED4.K 141.08,58.84 T7.3 143.82,61.41 D3.A
N$39
  Bottom 3.5: K4.11 165.72,62.81 168.66,59.87 X1.3
N$40
  Bottom 0.813: LED4.A 144.85,58.1 U$25.2
N$41
  Bottom 0.813: D4.A 144.06,72.2 T8.3 141.04,69.57 LED5.K 141.83,67.39 142.58,66.65 146.82,66.65 K4.A1
N$42
  pour Bottom (isolate 0.61): 1.61,20.78 40.84,20.78 40.84,0.02 1.62,0.02 1.62,20.77
N$43
  Bottom 0.813: LED5.A 147.14,71.54 U$29.2
N$44
  Bottom 0.61: OK8.1 77.27,58.68 76.47,57.87 76.47,54.38 U$27.2
N$45
  Bottom 0.813: T9.C 7.04,15.48 | 7.04,15.48 7.69,16.12 7.69,18.81 R2.1 | Q1.G 8.36,14.17 7.04,15.48
N$46
  Bottom 0.813: D6.C 23.6,14.27 X7.2 | 22.15,12.83 D6.C | Q1.D 14.04,10.51 14.41,10.13 R1.2 21.8,12.86 D6.C
N$47
  Bottom 0.813: T9.B 6.11,12.94 R1.1 8.92,7.92 D5.C
N$48
  Bottom 0.813: T10.C 48.95,15.48 | 48.95,15.48 49.6,16.12 49.6,18.81 R5.1 | Q3.G 50.27,14.17 48.95,15.48
N$49
  Bottom 0.813: SG1.+ 31.23,7.78 D6.A 18.08,3.67 R3.2
N$50
  Bottom 0.813: R3.1 6.82,3.04 LED6.K
N$51
  Bottom 0.813: D8.C 65.51,14.27 X9.2 | 64.06,12.83 D8.C | Q3.D 55.95,10.51 56.32,10.13 R4.2 63.71,12.86 D8.C
N$52
  Bottom 0.813: T10.B 48.02,12.94 R4.1 50.83,7.92 D7.C
N$53
  Bottom 0.813: SG2.+ 73.14,7.78 D8.A 59.99,3.67 R6.2
N$54
  Bottom 1.422: OK4.4 111.67,71.18 T1.G
N$55
  Bottom 1.422: 131.92,93.63 U$1.2 | T1.T1 115.94,83.23 115.21,83.95 115.21,87.8 118.02,90.62 118.02,93.37 C14.1
  Bottom 1.778: C14.1 131.92,93.63
N$56
  Bottom 1.422: 164.21,85.56 U$2.2 | 134.91,93.63 U$1.1 | 153.95,85.56 149.91,89.6
  Bottom 1.676: 164.21,85.56 153.95,85.56 | 149.91,89.6 147.16,89.6 145.7,91.06
  Bottom 1.778: 134.91,93.63 C14.2 145.7,91.06
N$57
  Bottom 0.813: R6.1 48.73,3.04 LED7.K
N$58
  pour Bottom (isolate 0.61): 43.52,20.78 82.75,20.78 82.75,0.02 43.53,0.02 43.53,20.77
N$59
  Bottom 0.813: T11.C 90.86,15.48 | 90.86,15.48 91.51,16.12 91.51,18.81 R12.1 | Q4.G 92.18,14.17 90.86,15.48
N$60
  Bottom 0.813: D10.C 107.42,14.27 X11.2 | 105.97,12.83 D10.C | Q4.D 97.86,10.51 98.23,10.13 R9.2 105.62,12.86 D10.C
N$61
  Bottom 0.813: T11.B 89.93,12.94 R9.1 92.74,7.92 D9.C
N$62
  Bottom 1.422: OK5.4 120.78,63.86 121.73,64.81 121.73,70.98 T2.G
N$63
  Bottom 1.422: 131.56,85.73 U$11.2 | 119.77,85.73 C15.1
  Bottom 1.676: T2.T1 121.46,82.67 C15.1
  Bottom 1.778: C15.1 131.56,85.73
N$64  (via drill 1 pad 1.93)
  Top 1.676: v155.79,89.09 155.43,89.46
  Top 1.778: 155.43,89.46 v140.96,89.46
  Bottom 1.422: 134.49,85.73 U$11.1
  Bottom 1.676: 144.74,85.73 C15.2 144.69,85.73 | U$12.2 163.71,89.09 v155.79,89.09
  Bottom 1.778: C15.2 142.19,85.73 134.49,85.73
  Bottom 1.93: v140.96,89.46 140.96,86.95 142.19,85.73
N$65
  Bottom 0.813: SG3.+ 115.05,7.78 D10.A 101.9,3.67 R13.2
N$66
  Bottom 0.813: R13.1 90.64,3.04 LED8.K
N$67
  pour Bottom (isolate 0.61): 85.43,20.78 124.66,20.78 124.66,0.02 85.44,0.02 85.44,20.77
N$68
  Bottom 0.813: T12.C 132.77,15.48 | 132.77,15.48 133.42,16.12 133.42,18.81 R18.1 | Q5.G 134.09,14.17 132.77,15.48
N$69
  Bottom 0.813: D12.C 149.33,14.27 X13.2 | 147.88,12.83 D12.C | Q5.D 139.77,10.51 140.14,10.13 R17.2 147.53,12.86 D12.C
N$70
  Bottom 1.676: OK6.4 120.27,55.37 126.66,61.76 T3.G
N$71  (1 unrouted)
  Bottom 1.676: T3.T1 126.66,79.67 129.24,82.26
  Bottom 1.778: 129.24,82.26 147.31,82.26 149.89,84.85 C16.1
  Bottom 1.93: 149.89,93.6 C17.1 151.27,95.12 U$13.2
N$72
  Bottom 1.27: U$14.2 164.42,92.01 167.29,94.87 U$13.1
  Bottom 1.93: C16.2 177.26,85.61 C17.2 175.81,95.12 U$13.1
N$73
  Bottom 0.813: T12.B 131.84,12.94 R17.1 134.65,7.92 D11.C
N$74
  Bottom 0.813: SG4.+ 156.96,7.78 D12.A 143.81,3.67 R19.2
N$75
  Bottom 0.813: R19.1 132.55,3.04 LED9.K
N$76
  pour Bottom (isolate 0.61): 127.34,20.78 166.57,20.78 166.57,0.02 127.35,0.02 127.35,20.77
N$77
  Bottom 0.813: T13.C 174.68,15.48 | 174.68,15.48 175.33,16.12 175.33,18.81 R21.1 | Q6.G 176,14.17 174.68,15.48
N$78
  Bottom 1.676: OK7.4 121.72,46.95 127.11,52.34 127.11,55.37 132.06,60.33 132.06,71.38 T4.G
N$79
  Bottom 0.813: D14.C 191.24,14.27 X15.2 | 189.79,12.83 D14.C | Q6.D 181.68,10.51 182.05,10.13 R20.2 189.44,12.86 D14.C
N$80
  Bottom 0.813: T13.B 173.75,12.94 R20.1 176.56,7.92 D13.C
N$81
  Bottom 0.813: SG5.+ 198.87,7.78 D14.A 185.72,3.67 R22.2
N$82
  Bottom 0.813: R22.1 174.46,3.04 LED10.K
N$83
  pour Bottom (isolate 0.61): 169.25,20.78 208.48,20.78 208.48,0.02 169.26,0.02 169.26,20.77
NEUTRAL  (1 unrouted)
  Bottom 1.93: X3.2 112.21,94.91 110.96,96.16 97.56,96.16 96.32,94.91 96.32,91.39 X5.1
OSC1
  Bottom 0.61: IC2.16 53.98,65.22 R16.1
OSC2
  Bottom 0.61: IC2.15 55.51,66.49 R16.2
RFD0
  Bottom 0.61: IC2.10 60.65,72.84 62.02,74.22 64.29,74.22 JP1.11
RFD1
  Bottom 0.61: IC2.11 64.26,71.57 JP1.13
RFD2
  Bottom 0.61: IC2.12 60.3,70.3 61.49,69.11 JP1.15
RFD3
  Bottom 0.61: IC2.13 59.01,69.03 60.72,67.32 60.72,64.69 61.45,63.97 64.27,63.97 JP1.19
RX
  Bottom 0.61: JP1.10 74.08,76.72 JP3.4
SCL  (via drill 0.8 pad 2.18)
  Top 0.61: v59.7,89.56 v59.7,80.21
  Bottom 0.406: 51.19,85.06 51.19,82.57 51.71,82.05 U$15.6 | JP2.3 73.2,96.84 61.91,96.84 59.7,94.62 v59.7,89.56
  Bottom 0.61: U$15.6 60.46,82.05 | 60.46,82.05 64.08,82.05 JP1.5 | R7.2 51.19,85.06 | v59.7,80.21 59.7,81.29 60.46,82.05
SDA
  Bottom 0.406: 61.31,93.64 61.3,93.63 | JP2.4 71.78,95.71
  Bottom 0.61: U$15.5 56.83,83.32 | 56.83,83.32 60.36,83.32 61.48,84.44 | 61.48,84.44 64.23,84.44 JP1.3 | R8.2 55.8,84.35 56.83,83.32 | 71.78,95.71 62.37,95.71 61.3,94.64 61.3,93.63 62.02,92.91 62.02,88.49 61.48,87.94 61.48,84.44
SW-1
  Bottom 0.61: JP1.37 45.22,41.16 44.33,42.05
  Bottom 1.27: CN2.2 arc90 44.33,37.1 44.33,42.05 RN1.2
SW-2
  Bottom 0.61: JP1.35 55.67,43.7 51.78,47.59 42.26,47.59 41.82,47.14 41.82,44.61 RN1.3
  Bottom 1.27: CN2.3 arc90 41.79,37.1 RN1.3
SW-3
  Bottom 0.61: JP1.33 55.39,46.24 52.96,48.67 40.3,48.67 39.25,47.63 RN1.4 | RN1.4
  Bottom 1.27: CN2.4 arc90 39.25,37.1 RN1.4
SW-4
  Bottom 0.61: JP1.31 55.16,48.78 53.96,49.98 38.52,49.98 36.68,48.13 36.68,44.62 RN1.5
  Bottom 1.27: CN2.5 arc90 36.71,37.1 RN1.5
TX
  Bottom 0.61: JP1.8 74.08,79.26 JP3.3
UP
  Bottom 0.61: JP1.29 37.11,51.32 34.14,48.35 34.14,44.61 RN1.6
  Bottom 1.27: CN2.6 arc90 34.17,37.1 RN1.6

## Text on the board
tPlace: I2C EXT | RF434 | HBT SMPS | Rpi PWR | Vin | 5V | 12V | + | - | - | + | - | + | - | + | + | O/P | O/P | O/P | O/P | O/P | I/P | I/P | I/P | I/P | I/P
bPlace: 3V3 | Designed By | HONEY BEES